# Altium PCB NaiS6202HD_0.7 - Copy.PcbDoc (part 2 of 2)
Units mm, origin at the board's own origin, x right, y up, seen from the top; angles counter-clockwise.
Board outline 60 x 38 mm, 4 copper layers (Top, INT1, GND, Bottom), stack 0.965 mm thick; 148 components, 224 nets, 688 pads, 377 vias.
Unrouted connection lines stored in the file: 231.
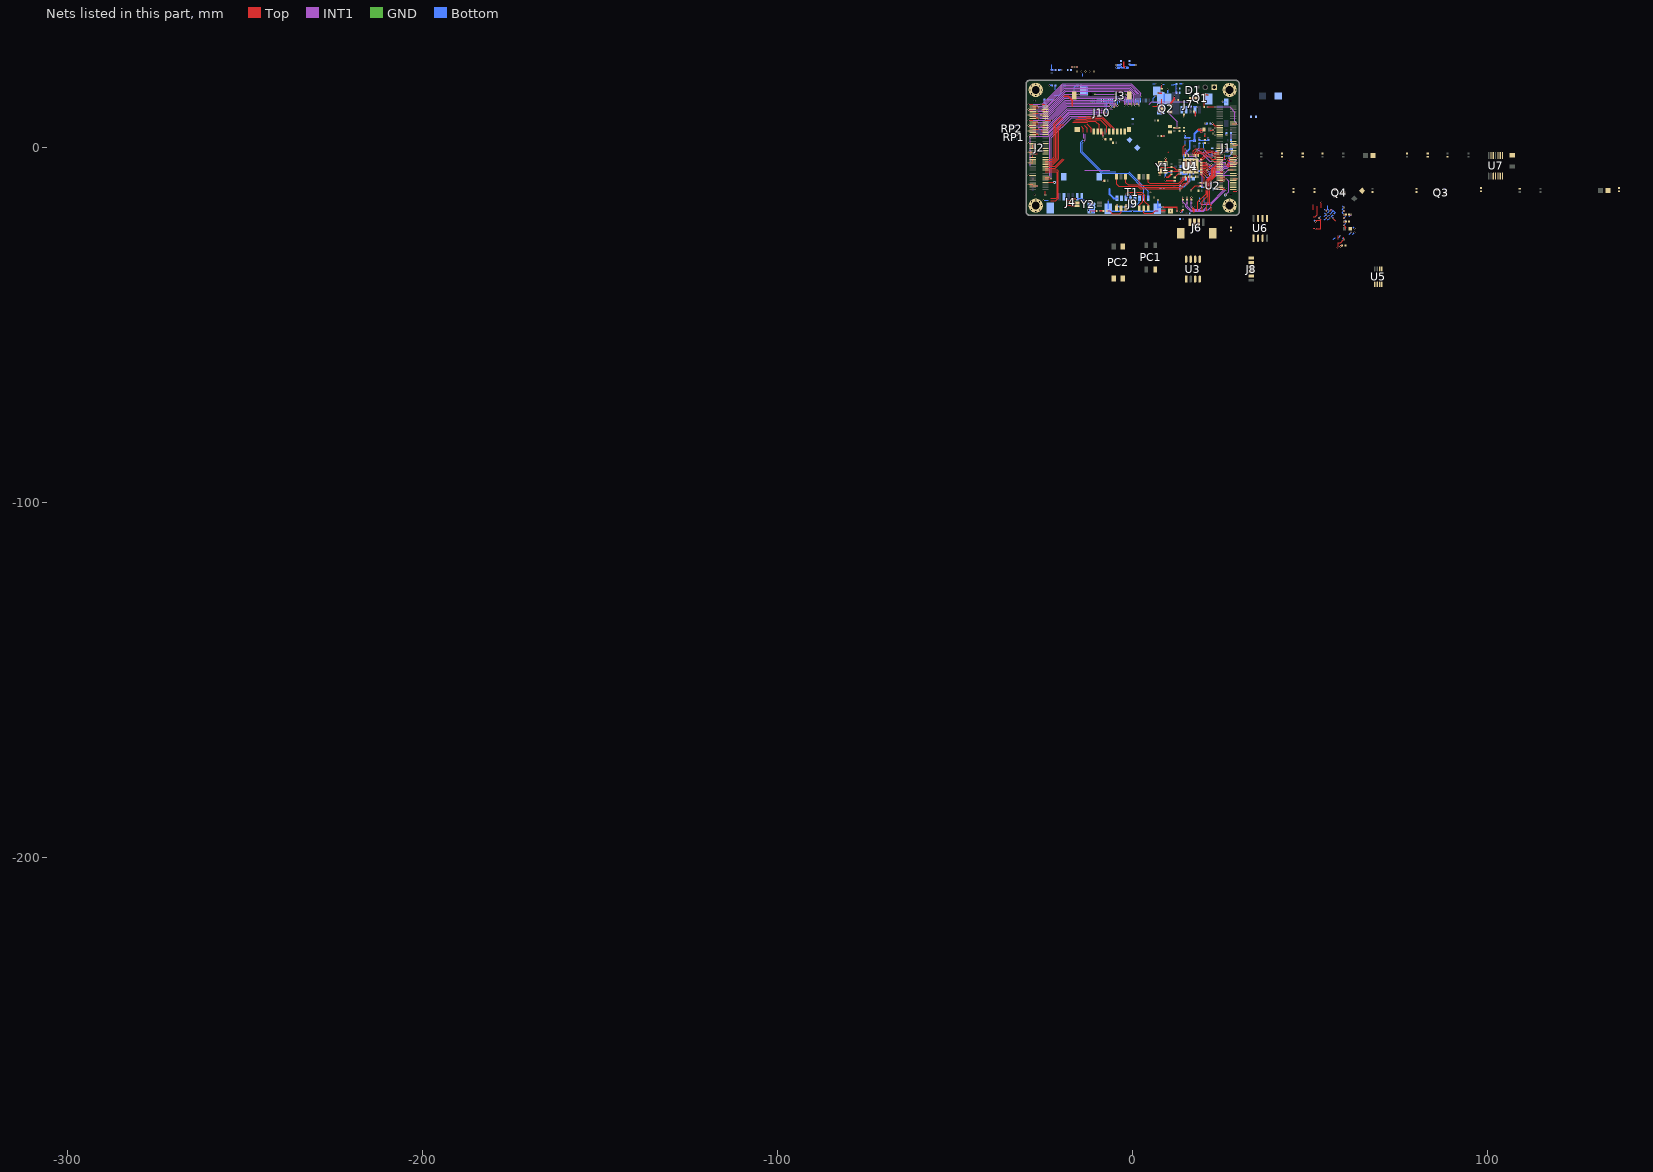
[diagram p4: the nets of this part, all layers, seen from the top]

## Via types
v1: diameter 0.5, hole 0.25, Top to Bottom, tented both sides, 331 vias
v2: diameter 0.5, hole 0.25, Top to Bottom, 46 vias

## Nets (pads, with @x,y where several pads share a name; then routed paths per layer and width w, separated by ;. In a path a pad name is that pad's centre, name@x,y a point inside that pad or via, vN(x,y) a via of type N, cw(c..) or ccw(c..) an arc to the next point about the centre after c; other vN are vias at no path point) (continued)
GND: BAT1.2 BC1.2 BC2.2 BC3.2 BC4.2 BC5.2 BC6.2 BC7.2 BC8.2 BC9.2 BC10.2 BC11.2 BC12.2 BC13.2 BC14.2 BC15.2 BC16.1 BC17.1 BC18.1 BC19.1 BC20.1 BC21.1 C1.1 C2.2 C3.1 C4.1 C5.2 C6.2 C7.2 C8.2 C9.2 C10.2 C11.2 C12.2 C14.2 C15.2 C16.2 C17.2 C18.2 C21.2 C22.2 C23.2 C24.1 C25.1 C26.1 D1.1 J1.2 J1.13 J1.16 J1.17 J1.23 J1.33 J1.42 J1.47 J1.49 J1.51 J1.53 J1.63 J1.65 J1.67 J1.69 J1.71 J1.73 J2.1 J2.8 J2.10 J2.20 J2.34 J2.44 J2.46 J2.56 J2.64 J2.69 J2.70 J2.75 J2.76 J2.81 J2.82 J2.87 J2.88 J2.93 J2.94 J2.99 J2.100 J3.5 J3.8 J3.11 J3.14 J3.17 J3.20 J3.23 J3.26 J3.29 J3.32 J3.M1 J3.M2 J4.2 J4.M1 J4.M2 J5.1 J6.4 J6.5 J6.6 J7.2 J7.M1 J7.M2 J8.2 J9.2 J9.9 J9.10 J10.6 J10.9 J10.10 J10.11 J10.12 MH1.1 MH2.1 MH3.1 MH4.1 PC2.2 PC2.3 Q1.2 Q2.2 Q4.2 R14.1 R16.1 R17.1 R18.1 R19.1 R22.1 R32.1 R33.1 R35.1 R50.1 SW1.2 TVS1.2 TVS2.2 U1.M1 U2.7 U3.4 U4.2 U5.4 U6.5 U7.7 U7.12 U7.13 Y1.2 Y1.4 | length 409.3
  Top w0.2: -12,-17.8 C22.2@-10.15,-17.8 ; v1@7.469,-7.72 v1(7.55,-7.72) ; 8.173,16.923 v1(8.173,17.823) ; 9.9,-1.149 10,-1.249 ; v1(12.475,-17.775) 12.475,-17.694 12.608,-17.561 12.608,-16.65 ; v1(14.4,8.8) BC21.1@14.4,9.35 ; 17.1,-17.875 v1(17.1,-16.6) ; 21.837,5 v1(22.6,5) ; 50.886,-22.65 51.336,-22.65 v1(51.486,-22.8) 52.936,-22.8 52.936,-20.4 ; v1(51.486,-20.8) 51.886,-20.4 52.936,-20.4 ; v1(52.486,-19.8) 52.936,-20.25 52.936,-20.4 ; 53.127,-16.889 v1(53.127,-15.36) ; v1(54.486,-17.8) 54.486,-17.35 ; v1(55.486,-17.8) 55.886,-17.4 55.886,-17.25 ; v1(56.486,-19.8) 56.486,-20.05 57.036,-20.6 ; v1(57.616,-28.163) 57.936,-27.843 57.936,-26.723 58.563,-26.723 v1(59.486,-25.8) 59.486,-25.25 ; 57.936,-25.823 57.936,-24.8 ; v1(58.489,-27.802) 58.791,-27.5 R19.1@59.036,-27.5 ; v1(59.486,-21.8) 60.036,-22.35 60.036,-22.8 ; v1(59.486,-20.8) C25.1@60.036,-20.8 ; v1(59.486,-18.8) C24.1@60.036,-18.8
  Top w0.254: v1(-29.331,-10.25) J2.10@-28.17,-10.25 ; v1(-29.331,-7.75) J2.20@-28.17,-7.75 ; v1(-29.331,-4.25) J2.34@-28.17,-4.25 ; v1(-29.331,-1.25) J2.46@-28.17,-1.25 ; v1(-29.331,1.25) J2.56@-28.17,1.25 ; v1(-29.331,4.75) J2.70@-28.17,4.75 ; v1(-29.331,6.25) J2.76@-28.17,6.25 ; v1(-29.331,7.75) J2.82@-28.17,7.75 ; v1(-29.331,9.25) J2.88@-28.17,9.25 J2.88@-28.095,9.25 ; v1(-29.331,10.75) J2.94@-28.17,10.75 J2.94@-28.095,10.75 ; v1(-29.331,12.25) J2.100@-28.17,12.25 ; J2.8@-28.17,-10.75 v1(-26.95,-10.75) ; J2.44@-28.17,-1.75 -26.95,-1.75 ; -25.8,4.75 J2.69@-24.57,4.75 ; v1(-25.8,6.25) J2.75@-24.57,6.25 ; v1(-25.8,9.25) J2.87@-24.57,9.25 ; -25.8,10.75 J2.93@-24.645,10.75 ; v1(-25.8,12.25) J2.99@-24.57,12.25 ; v1(-24.57,-13.305) J2.1@-24.57,-12.25 ; J2.81@-24.57,7.75 v1(-22.9,7.75) ; v1(23.2,-4.25) J1.33@24.47,-4.25 ; J1.13@24.47,-9.25 v1(25.7,-9.25) ; J1.17@24.47,-8.25 v1(25.7,-8.25) ; J1.2@28.27,-12.25 v1(29.5,-12.25) ; J1.16@28.27,-8.75 v1(29.5,-8.75) ; J1.42@28.27,-2.25 v1(29.5,-2.25)
  Top w0.3: 5.6,11.7 6.8,11.7 v1(7.3,12.2) ; C21.2@10.05,-17.8 v1(10.6,-17.8) ; J1.23@24.645,-6.75 v1(25.7,-6.75)
  Top w0.4: -19.363,14.52 -18.12,14.52 -17,13.4 -17,11.7 ; v1(-8.4,3.164) -8.4,4.538 ; v1(-8.2,2.4) TVS2.2@-7.61,2.4 ; -2.529,24.155 -2.529,22.989 v1(-2.075,22.535) ; v1(7.2,15.4) 8.123,15.4 ; v1(7.55,-7.72) Y1.2@7.55,-6.6 ; BC20.1@8.07,3.28 v1(8.85,3.28) ; v1(8.366,-16.7) 12.558,-16.7 ; v2(9.2,-8.3) 10.05,-8.3 10.9,-7.45 ; v2@9.201,-9.299 R32.1@11.836,-9.299 ; Y1.4@9.25,-4.4 v1(9.25,-3.007) ; Q2.2@10.654,11.949 10.654,12.555 11.7,13.6 v1(11.7,14.4) ; v1(13.5,-18) 13.577,-18 BC1.2@14.127,-17.45 ; 17.125,-18.175 17.125,-17.1 ; v1(17.6,8.85) 17.6,10.2 ; Q1.2@20.203,14.9 v1(21.2,14.9) ; 20.3,3.1 v1(20.3,3.9)
  INT1 w0.254: v1(-29.331,4.75) -24.094,4.75 -18.221,10.623 -7,10.623 ; v1(-29.331,6.25) v1(-25.8,6.25) -24.4,6.25 v1(-22.9,7.75) -18.504,12.146 -5.896,12.146 v2(-5.25,11.5) ; v1(-29.331,7.75) -24.702,7.75 -19.052,13.4 -2.7,13.4 -2.25,12.95 v2(-2.25,11.9) ; v1(-29.331,9.25) v1(-25.8,9.25) -24.975,9.25 -19.125,15.1 -12.947,15.1 ; v1(-29.331,10.75) -25.249,10.75 -19.226,16.773 -0.969,16.773 0.75,15.054 v2(0.75,11.9) ; v1(-29.331,12.25) v1(-25.8,12.25) -25.522,12.25 -19.745,18.027 -0.423,18.027 2.25,15.354 v2(2.25,14.35) ; -28.8,-5 -28.8,2.719 v1(-29.331,3.25) -23.821,3.25 -17.702,9.369 -9.3,9.369 ; -13.477,-6.284 -6.516,-6.284 ; v1(-10.633,15.1) v1(-4.962,15.1) ; v1(-2,15.1) -0.75,13.85 v2(-0.75,12.3)
  Bottom w0.2: -14.094,20.111 -14.094,20.911 ; v2(-2.25,11.9) J3.20@-2.25,13.35 ; v2(-0.75,12.3) J3.23@-0.75,13.35 ; v2(0.75,11.9) J3.26@0.75,13.35 ; v1(8.173,17.823) 8.873,17.823 ; 50.986,-20.3 v1(51.486,-20.8) ; v1(52.486,-19.8) 52.986,-19.3 ; 53.986,-20.3 v1(54.486,-19.8) ; 53.986,-19.3 v1(54.486,-18.8) 53.986,-18.3 ; 53.986,-17.3 v1(54.486,-17.8) 54.986,-17.3 ; 54.986,-20.3 v1(55.486,-19.8) ; 54.986,-19.3 v1(55.486,-18.8) 56.486,-17.8 ; 54.986,-18.3 v1(55.486,-17.8) ; 54.986,-16.3 54.986,-17.3 ; 56.486,-25.8 56.986,-25.3 ; v1(56.486,-19.8) 55.986,-19.3 v1(56.486,-18.8) 56.986,-18.3 56.486,-17.8 ; 57.986,-25.3 v1(58.486,-24.8) ; v1(58.489,-27.802) 58.989,-27.302 ; 58.986,-25.3 v1(59.486,-25.8) ; 58.986,-16.3 v1(59.486,-16.8) 58.986,-17.3 v1(59.486,-17.8) 58.986,-18.3 v1(59.486,-18.8) ; v1(59.486,-21.8) 59.986,-21.3 ; v1(59.486,-20.8) 59.986,-20.3 ; v1(59.486,-19.8) 59.986,-19.3 ; 60.986,-24.3 v1(61.486,-23.8) ; 61.986,-24.3 v1(62.486,-23.8) ; 61.986,-22.3 v1(62.486,-22.8) ; 54.986,-17.3 v1(55.486,-17.8) ; v1(55.486,-17.8) 55.986,-17.3 56.486,-17.8
  Bottom w0.254: v2(-6.75,12.15) J3.11@-6.75,13.35 ; v2(-5.25,11.5) J3.14@-5.25,13.35 ; J3.29@2.25,13.35 v2(2.25,14.35)
  Bottom w0.3: -25.8,10.75 -25.195,10.75 R16.1@-24.645,11.3 ; v1(-25.1,-14.8) -23.843,-14.8 ; 5.643,18 v1(6.5,18) ; v1(6.5,14.6) 5.8,13.9 5.8,12.779 6.721,12.779 v1(7.3,12.2) ; v1(18.8,2.8) 18.8,2.15 BC10.2@21.3,2.15 v1(21.3,2.8) ; v1(25.2,13) 26.221,13 SW1.2@26.378,12.843 ; v1(26.4,3.6) C2.2@26.4,4.15
  Bottom w0.4: v1(-23.5,17.564) C9.2@-22.65,17.564 ; R17.1@-20.744,21.911 v1(-19.994,21.911) ; v1(-12.5,-17.6) J4.M2@-11,-17.6 ; v1(-11.9,-18.1) J4.M2@-11,-18.1 ; J9.10@-6.9,-17.133 v1(-6.9,-14.8) ; J9.10@-6.183,-17.9 v1(-0.1,-17.9) J9.9@6.183,-17.9 ; -3.275,22.895 -3.275,22.535 v1(-2.075,22.535) ; J9.9@7.1,-16.983 v1(7.1,-14.7) ; J9.9@7.1,-16.7 v1(8.366,-16.7) ; v2(9.2,-8.3) 9.2,-7.4 9.851,-6.749 ; 9.873,15.43 v1(9.873,16.423) ; 9.9,-6.7 BC14.2@10.95,-6.7 ; v2(13.3,-12) 13.3,-11.051 14.349,-11.051 16.1,-9.3 16.1,-6.86 ; 13.3,18 v1(14.1,18) ; v1(13.5,-18) 14.158,-18 ; BC9.2@13.9,-7.499 15.068,-7.499 v1(15.068,-6.86) 16.1,-6.86 ; v1(14.8,3.7) 14.8,2.85 BC13.2@16,2.85 ; v1(15.5,-3.583) BC5.2@15.5,-2.999 ; v1(16.663,-3.586) BC4.2@16.663,-3.003 ; 17.068,-7.499 v1(17.068,-6.86) 16.1,-6.86 ; 17.18,11.5 v1(18.2,11.5) ; v1(17.6,-3.549) BC12.2@18.35,-3.549 ; v1(18.05,-6.599) BC8.2@18.818,-6.599 ; v1(20.4,6.8) C1.1@20.95,6.8 ; v1(26.3,0.1) 26.3,0.05 26.7,-0.35 27.9,-0.35
  Bottom w0.6: v1(-4.575,22.535) -3.685,22.535 ; v1(-4.558,23.335) C5.2@-3.498,23.335 ; v1(-2.075,22.535) -1.279,22.535
  other v1: -27.3,-17.9 27.3,-17.9 -26.2,-17.5 28.4,-17.5 -28.5,-17.4 26.1,-17.4 -28.9,-16.3 -25.7,-16.3 25.7,-16.3 28.9,-16.3 -28.5,-15.2 -26.2,-15.2 26.1,-15.2 28.4,-15.2 -27.3,-14.7 27.3,-14.7 6,-14 5,-12.5 25.816,-0.427 25.773,0.584 23.17,3.505 22.643,3.989 23.127,4.516 23.084,5.527 -27.3,14.7 27.3,14.7 -26.2,15.1 -15.3,15.1 28.4,15.1 -28.5,15.2 26.1,15.2 -28.9,16.3 -25.7,16.3 25.7,16.3 28.9,16.3 -28.5,17.4 -26.2,17.4 26.1,17.4 28.4,17.4 -27.3,17.9 27.3,17.9 -15.694,21.511 -14.494,21.511 -13.294,21.511 -12.094,21.511 -10.894,21.511 -17.094,22.711 -16.421,22.711 -15.721,22.711
  other v2: 9.201,-9.3
HDMI_INT: J1.24
HDMI_RSTN: J2.55
HP_INSERT_DET: J1.80
IIC_CLK: J2.25 J7.4 U5.6 | length 13.8
  Top w0.2: J2.25@-24.57,-6.25 -21.25,-6.25 -20.9,-6.6 -20.9,-14.166 -21.634,-14.9 -23.05,-14.9
IIC_SDA: J2.23 J7.5 U5.5 | length 12.2
  Top w0.2: J2.23@-24.57,-6.75 -21.55,-6.75 -21.3,-7 -21.3,-14 -21.55,-14.25 -23.05,-14.25
INT_N: R21.1 U1.34 U2.11 | length 18.2
  Top w0.2: 14.668,-2.149 14.668,-1.2 14.8,-1.068 v2(14.8,-0.357)
  INT1 w0.2: v2(14.8,-0.357) 15.2,-0.757 15.2,-1.573 15.95,-2.323 17.523,-2.323 19.65,-4.45 19.65,-10.65 v2(20.1,-11.1)
  Bottom w0.2: R21.1@19.45,-11.084 20.084,-11.084 20.668,-10.5 U2.11@21.7,-10.5
KEY_1: J1.54 R5.1 R8.1 | length 6
  Top w0.2: J1.54@28.27,0.75 v1(29.5,0.75)
  Bottom w0.2: 27.7,4.15 27.7,1.5 28.45,0.75 v1(29.5,0.75)
KEY_2: J1.56
LCD_EN: J1.46
LCD_RST: J1.44
LED0: J9.7 Q1.3 R1.1 | length 45.1
  Top w0.2: R1.1@16.1,14.05 v1(16.95,14.05) Q1.3@17.861,14.05
  INT1 w0.2: v1(-13.8,2.4) -13.8,3.966 ; 4.6,12.2 5.3,12.9 15.8,12.9 v1(16.95,14.05)
  Bottom w0.2: v1(-13.8,2.4) -14.6,1.6 -14.6,-1.3 -8.7,-7.2 -1.3,-7.2 3.125,-11.625 J9.7@3.125,-14.258
LED1: J9.8 Q2.3 R6.1 | length 32
  Top w0.2: 8.25,13.6 8.25,10.9 8.266,10.9 Q2.3@8.361,10.995 v1(8.361,10.245)
  INT1 w0.2: v1(-13.8,1.7) -13.8,1.764 -13.35,2.214 -13.35,3.85 ; 6.995,10.7 7.45,10.245 v1(8.361,10.245)
  Bottom w0.2: v1(-13.8,1.7) -14.2,1.3 -14.2,-1.134 -8.534,-6.8 -4.8,-6.8 ; -1.134,-6.8 4.375,-12.309 J9.8@4.375,-14.258
LED_AD0: R18.2 U1.35 | length 4.3
  Top w0.2: 14.268,-2.149 14.268,0.268 v2(14.8,0.8)
  Bottom w0.2: v2(14.8,0.8) 14.8,1.95
LED_GN: Q2.1 R4.1 R7.1 | length 7.5
  Top w0.2: v1(9.841,10.041) Q2.1@10.654,10.041 ; 11.7,5.65 12.902,5.65
  INT1 w0.2: v1(9.841,10.041) 12.49,7.392 v1(12.49,5.677)
LED_MLINK: Q1.1 R3.1 | length 1.5
  Top w0.2: 20.154,11.504 Q1.1@20.154,13.041
LX_1V2: BC11.1 BC15.1 FB3.1 FB4.1 L1.1 | length 17.2
  Top w0.6: 18.57,5.08 20.27,5.08 ; v1(19.3,4.5) v1(19.3,5.3)
  Bottom w0.4: FB4.1@13.562,-5.349 14.4,-4.511 14.4,-1.9 16,-0.3 16,1.95 FB3.1@17.388,1.95
  Bottom w0.6: FB3.1@17.4,1.962 17.4,3.9 18.4,4.9 19.3,4.9 ; v1(19.3,4.5) v1(19.3,5.3)
MDI0N: T1.3 U1.3 | length 15.8
  Top w0.2: T1.3@1.898,-8.555 1.898,-9.987 2.4,-10.489 13.062,-10.489 14.668,-8.883 14.668,-8.149
MDI0P: T1.1 U1.2 | length 12.2
  Top w0.2: T1.1@4.436,-8.555 4.436,-9.736 4.734,-10.034 12.95,-10.034 14.268,-8.717 14.268,-8.149
MDI1N: T1.8 U1.6 | length 24.8
  Top w0.2: T1.8@-4.452,-8.555 -4.452,-10.223 -3.863,-10.812 1.412,-10.812 2.1,-11.5 13.615,-11.5 14.666,-10.449 15.164,-10.449 15.868,-9.746 15.868,-8.149
MDI1P: T1.6 U1.5 | length 21.4
  Top w0.2: T1.6@-1.912,-8.355 -1.912,-9.788 -1.288,-10.412 1.578,-10.412 2.266,-11.1 13.449,-11.1 14.5,-10.049 14.999,-10.049 15.468,-9.58 15.468,-8.149
MDI2N: C6.1 U1.8
MDI2P: C5.1 U1.7
MDI3N: C8.1 U1.11
MDI3P: C7.1 U1.10
MIC_DATA_PDM: J1.1
MIC_SCLK_PDM: J1.7
MIPI_CSI_CLK0_DN: J2.74 J3.12 | length 26.1
  Top w0.2: J2.74@-28.17,5.75 v1(-26.95,5.75)
  INT1 w0.2: v1(-26.95,5.75) -24.264,5.75 -18.364,11.65 v2(-6.25,11.65)
  Bottom w0.2: v2(-6.25,11.65) J3.12@-6.25,13.35
MIPI_CSI_CLK0_DP: J2.72 J3.13 | length 27.1
  Top w0.2: J2.72@-28.17,5.25 v1(-26.436,5.25)
  INT1 w0.2: v1(-26.436,5.25) -24.198,5.25 -18.398,11.05 v2(-5.75,11.05)
  Bottom w0.2: v2(-5.75,11.05) J3.13@-5.75,13.35
MIPI_CSI_CLK1_DN: J2.90 J3.24 | length 35.2
  Top w0.2: J2.90@-28.17,9.75 v1(-26.436,9.75)
  INT1 w0.2: v1(-26.436,9.75) -25.079,9.75 -18.883,15.946 -1.503,15.946 -0.25,14.693 v2(-0.25,11.9)
  Bottom w0.2: v2(-0.25,11.9) J3.24@-0.25,13.35
MIPI_CSI_CLK1_DP: J2.92 J3.25 | length 35.2
  Top w0.2: J2.92@-28.17,10.25 v1(-26.95,10.25)
  INT1 w0.2: v1(-26.95,10.25) -25.145,10.25 -19.049,16.346 -1.146,16.346 0.25,14.95 v2(0.25,12.3)
  Bottom w0.2: v2(0.25,12.3) J3.25@0.25,13.35
MIPI_CSI_D0_N: J2.68 J3.9 | length 26.1
  Top w0.2: J2.68@-28.17,4.25 v1(-26.95,4.25)
  INT1 w0.2: v1(-26.95,4.25) -23.99,4.25 -18.044,10.196 -7.896,10.196 v2(-7.8,10.1)
  Bottom w0.2: v2(-7.8,10.1) -7.75,10.15 J3.9@-7.75,13.35
MIPI_CSI_D0_P: J2.66 J3.10 | length 27.6
  Top w0.2: J2.66@-28.17,3.75 v1(-26.436,3.75)
  INT1 w0.2: v1(-26.436,3.75) -23.924,3.75 -17.878,9.796 -8.132,9.796 -7.986,9.65 -7.05,9.65 v2(-7,9.6)
  Bottom w0.2: J3.10@-7.25,13.35 -7.25,9.85 v2(-7,9.6)
MIPI_CSI_D1_N: J2.80 J3.15 | length 27.2
  Top w0.2: J2.80@-28.17,7.25 v1(-26.95,7.25)
  INT1 w0.2: v1(-26.95,7.25) -24.598,7.25 -18.875,12.973 -5.423,12.973 v2(-4.75,12.3)
  Bottom w0.2: v2@-4.75,12.2 v2(-4.75,12.3) J3.15@-4.75,13.35
MIPI_CSI_D1_P: J2.78 J3.16 | length 28.1
  Top w0.2: J2.78@-28.17,6.75 v1(-26.436,6.75)
  INT1 w0.2: v1(-26.436,6.75) -24.532,6.75 -18.709,12.573 -5.673,12.573 -4.95,11.85 -4.3,11.85 v2(-4.25,11.9)
  Bottom w0.2: v2(-4.25,11.9) J3.16@-4.25,13.35
MIPI_CSI_D2_N: J2.84 J3.21 | length 31.1
  Top w0.2: J2.84@-28.17,8.25 v1(-26.436,8.25)
  INT1 w0.2: v1(-26.436,8.25) -24.806,8.25 -19.156,13.9 -2.3,13.9 -1.75,13.35 v2(-1.75,12.3)
  Bottom w0.2: v2(-1.75,12.3) J3.21@-1.75,13.35
MIPI_CSI_D2_P: J2.86 J3.22 | length 32.6
  Top w0.2: J2.86@-28.17,8.75 v1(-26.95,8.75)
  INT1 w0.2: v1(-26.95,8.75) -24.872,8.75 -19.322,14.3 -2.134,14.3 -1.25,13.416 v2(-1.25,11.9)
  Bottom w0.2: v2(-1.25,11.9) J3.22@-1.25,13.35
MIPI_CSI_D3_N: J2.96 J3.27 | length 36.6
  Top w0.2: J2.96@-28.17,11.25 v1(-26.436,11.25)
  INT1 w0.2: v1(-26.436,11.25) -25.353,11.25 -19.403,17.2 -0.792,17.2 1.25,15.158 v2(1.25,12.3)
  Bottom w0.2: v2(1.25,12.3) J3.27@1.25,13.35
MIPI_CSI_D3_P: J2.98 J3.28 | length 38.1
  Top w0.2: J2.98@-28.17,11.75 v1(-26.95,11.75)
  INT1 w0.2: v1(-26.95,11.75) -25.418,11.75 -19.568,17.6 -0.6,17.6 1.75,15.25 v2(1.75,11.9)
  Bottom w0.2: v2(1.75,11.9) J3.28@1.75,13.35
MIPI_CSI_I2C_SCL: J2.17 J3.7 | length 27.2
  Top w0.2: J2.17@-24.57,-8.25 v1(-23.4,-8.25)
  INT1 w0.2: v1(-23.4,-8.25) -23.4,3.067 -17.525,8.942 -11.242,8.942
  GND w0.2: v1@-23.475,-8.25 v1(-23.4,-8.25)
MIPI_CSI_I2C_SDA: J2.15 J3.6 | length 26.5
  Top w0.2: J2.15@-24.57,-8.75 v1(-22.986,-8.75)
  INT1 w0.2: v1(-22.986,-8.75) -22.95,-8.714 -22.95,2.75 -17.2,8.5 -11.9,8.5
MIPI_DSI_CLKN: J2.83
MIPI_DSI_CLKP: J2.85
MIPI_DSI_D0N: J2.71
MIPI_DSI_D0P: J2.73
MIPI_DSI_D1N: J2.77
MIPI_DSI_D1P: J2.79
MIPI_DSI_D2N: J2.89
MIPI_DSI_D2P: J2.91
MIPI_DSI_D3N: J2.95
MIPI_DSI_D3P: J2.97
MIPI_SWITCH_SEL: J1.22
MMC1_CLK: J1.4
MMC1_CMD: J1.6
MMC1_D0: J1.14
MMC1_D1: J1.12
MMC1_D2: J1.10
MMC1_D3: J1.8
N21617464: D2.1 J9.1 | length 4.1
  Bottom w0.6: -6.5,-11.6 -6.5,-13.1 -5.342,-14.258 J9.1@-4.375,-14.258
N21624957: C11.1 R28.1 | length 1.1
  Top w0.4: 8.095,-17.8 9.15,-17.8
N21624998: C12.1 R29.1 | length 1.1
  Top w0.4: -9.25,-17.8 -8.195,-17.8
N21759423: L3.1 U4.3 | length 2.2
  Bottom w0.4: 8.923,12.873 8.923,15.073
N21759480: C20.2 R34.1 R35.2 U4.5 | length 4.5
  Top w0.254: v1(-8.5,-9.3) C20.2@-7.95,-9.3
  Bottom w0.2: 10.823,17.773 11.523,17.773 11.673,17.923 12.323,17.923 12.323,15.523
N21768552: L1.2 U1.32
N21768580: R17.2 U1.48
N21781792: U5.1 Y2.1 | length 3.8
  Top w0.2: -18.75,-16.2 -17.5,-16.2 -17.28,-16.42 Y2.1@-15.05,-16.42
N21781837: U5.2 Y2.4 | length 3.7
  Top w0.2: -18.75,-15.55 Y2.4@-15.02,-15.55
N21781846: BAT1.1 U5.3 | length 5.5
  Top w0.2: -18.75,-14.9 -17.6,-14.9 -17.4,-14.7
  Top w0.4: -17.4,-14.7 -17,-14.3 v1(-15.9,-14.3)
  Bottom w0.4: v1(-15.9,-14.3) -14.3,-14.3 -13.7,-14.9
N21825549: C13.2 L2.1 U3.3 | length 3.9
  Bottom w0.2: -14.635,17.485 -13.385,17.485 -12.783,16.883 -12.783,15.055
N21825600: R30.2 U3.7 | length 4.4
  Bottom w0.2: -22.07,14.846 -20.654,14.846 -20.1,15.4 -20.1,17.564
N21825631: R31.2 R32.2 U3.5 | length 4.2
  Top w0.2: R32.2@11.836,-8.309 12.795,-7.349 13.068,-7.349
  Bottom w0.2: -22.894,21.902 -21.745,21.902 ; -22.794,21.902 -22.794,23.311
N21825652: C18.1 U3.8 | length 1.3
  Bottom w0.2: -21.75,16.274 -21.75,17.564
N21825662: C19.1 U3.6 | length 2.7
  Bottom w0.2: -23.949,13.599 -22.208,13.599 ; -23.024,13.576 -22.07,13.576
N21825703: C19.2 R33.2 | length 4.7
  Top w0.2: v2(16.4,-12) 17.658,-10.742 C19.2@19.143,-10.742
  Bottom w0.2: -24.85,13.6 -24.85,12.85 -24.645,12.645 -24.645,12.2
N21833189: R23.1 U2.8
N21904475: Q3.1 R36.2 R37.2
N21904513: D3.1 Q3.3
N21904537: Q4.3 R38.2
N21904541: PC1.2 R38.1
N21904592: D3.2 R41.2
N21904643: PC2.1 R42.2
N21904713: R44.1 R45.2 U6.1
N21904745: C25.2 R46.1 R49.1 U6.6
N21904768: C24.2 R47.1 R50.2 U6.7 | length 1.3
  Top w0.2: C24.2@60.936,-18.8 v1(61.486,-18.8)
  Bottom w0.2: 60.986,-19.3 v1(61.486,-18.8)
N21911975: U7.3 U7.4 U7.5
N21911995: R52.2 U7.6 U7.9
N21912035: C26.2 R52.1 U7.10
N218255250: C13.1 U3.1 | length 2
  Bottom w0.2: -16.482,16.116 -16.482,17.018 -16.015,17.485 -15.535,17.485
N219045651: Q4.1 R39.2
POE_LINE_1_2+: R28.2 T1.15 | length 5.7
  Top w0.2: T1.15@3.082,-17.045 3.082,-18.282 3.3,-18.5 5.7,-18.5 6.4,-17.8 7.195,-17.8
POE_LINE_3_6-: R29.2 T1.10 | length 5.7
  Top w0.2: -7.305,-17.8 -6.5,-17.8 -5.742,-18.558 -3.6,-18.558 -3.268,-18.226 T1.10@-3.268,-17.045
QSPI_NAND_CLK: J2.41
QSPI_NAND_CS: J2.39
QSPI_NAND_IO0: J2.45
QSPI_NAND_IO1: J2.43
QSPI_NAND_IO2: J2.49
QSPI_NAND_IO3: J2.47
RESET_N: C9.1 R20.2 U1.13 U2.12 | length 6
  Top w0.2: U1.13@19.068,-7.349 19.3,-7.349 19.3,-7.6 20.1,-8.4 v2(20.1,-9.9) 19.201,-9.9 19.143,-9.842
  Bottom w0.2: R20.2@19.496,-9.9 v2(20.1,-9.9) 20.3,-10.1 21.3,-10.1
RGMII_MDC: J1.20 R12.2 U1.14 | length 15.1
  Top w0.2: U1.14@19.068,-6.949 19.5,-6.949 v1(20.6,-8.049) ; v1@20.6,-8.1 v1@20.6,-8.051 ; J1.20@28.095,-7.75 J1.20@28.27,-7.75 v1(29.5,-7.75)
  INT1 w0.2: v1(20.6,-8.049) 21.05,-8.499 22.287,-8.499 23.037,-7.75 v1(29.5,-7.75)
  Bottom w0.2: v1(20.6,-8.049) 20.851,-8.3 21.611,-8.3 22.011,-7.9 22.55,-7.9
RGMII_MDIO: J1.26 R13.2 U1.15 | length 12
  Top w0.2: U1.15@19.068,-6.549 19.864,-6.549 21.114,-7.8 v1(21.4,-7.8) ; v1(27.1,-6.25) J1.26@28.27,-6.25
  INT1 w0.2: v1(21.4,-7.8) 22.421,-7.8 22.871,-7.35 25.75,-7.35 26.85,-6.25 v1(27.1,-6.25)
  Bottom w0.2: v1(21.4,-7.8) 22.5,-6.7 22.55,-6.7
RGMII_RXC: J1.39 R19.2 U1.28 | length 12.7
  Top w0.2: 17.068,-2.149 17.068,-0.907 17.691,-0.284 19.984,-0.284 v2(20,-0.3) ; v1(23.2,-2.75) J1.39@24.47,-2.75 J1.39@24.645,-2.75
  INT1 w0.2: v2(20,-0.3) 20,-0.4 21.6,-2 22.45,-2 v1(23.2,-2.75)
  Bottom w0.2: v2@19.984,-0.284 19.984,0.666 ; v2(20,-0.3) 20,1.25
RGMII_RXCTL: J1.35 R22.2 U1.27 | length 11.9
  Top w0.2: 17.468,-2.149 17.468,-1.366 v2(18.1,-0.734) ; v1(22.449,-3.755) J1.35@24.645,-3.755 ; J1.35@24.47,-3.75 J1.35@24.645,-3.75
  INT1 w0.2: v2(18.1,-0.734) 18.634,-0.734 21.655,-3.755 v1(22.449,-3.755)
  Bottom w0.2: v2(18.1,-0.734) 18.798,-0.036 18.798,1.248
RGMII_RXD0: J1.41 R24.1 U1.26 | length 9.8
  Top w0.2: 17.868,-2.149 17.868,-1.672 18.44,-1.1 v2(19.7,-1.1) ; v2(22.4,-2.6) 22.75,-2.25 J1.41@24.47,-2.25 J1.41@24.645,-2.25
  INT1 w0.2: v2(19.7,-1.1) 21.2,-2.6 v2(22.4,-2.6)
  Bottom w0.2: v2(22.4,-2.6) 22.4,-1.05
RGMII_RXD1: J1.45 R16.2 U1.25 | length 9.5
  Top w0.2: 18.268,-2.149 18.268,-1.882 18.6,-1.549 19.1,-1.549 19.304,-1.754 20.046,-1.754 21,-0.8 22.451,-0.8 22.901,-1.25 J1.45@24.47,-1.25 v1(25.95,-1.25)
  Bottom w0.2: v1(25.95,-1.25) 26.7,-1.25
RGMII_RXD2: J1.43 R15.2 U1.24 | length 7.3
  Top w0.2: U1.24@19.068,-2.949 19.078,-2.939 19.511,-2.939 19.512,-2.939 19.512,-2.934 21.246,-1.2 22.285,-1.2 22.835,-1.75 v1(23.2,-1.75) J1.43@23.6,-1.75 ; J1.43@23.65,-1.75 J1.43@24.47,-1.75 J1.43@24.645,-1.75
  Bottom w0.2: v1(23.2,-1.75) 23.2,-1.45 23.6,-1.05
RGMII_RXD3: J1.37 R14.2 U1.23 | length 9.8
  Top w0.2: U1.23@19.068,-3.349 19.734,-3.349 20.814,-2.269 21.269,-2.269 22.233,-3.233 23.283,-3.233 23.3,-3.25 23.5,-3.25 ; J1.37@24.9,-3.25 25.6,-3.25 25.95,-2.9 v1(25.95,-2.2)
  Bottom w0.2: v1(25.95,-2.2) 27.4,-2.2 27.9,-1.7 27.9,-1.25
RGMII_TXC: J1.30 U1.21 | length 11.1
  Top w0.2: U1.21@19.068,-4.149 20.136,-4.149 20.236,-4.049 v1(20.7,-4.049) ; v1(26.05,-4.55) 26.75,-5.25 J1.30@28.27,-5.25
  INT1 w0.2: v1(20.7,-4.049) 20.7,-4.649 21.801,-5.75 24.253,-5.75 25.453,-4.55 v1(26.05,-4.55)
RGMII_TXCTL: J1.32 U1.20 | length 10.4
  Top w0.2: U1.20@19.068,-4.549 v1(21.3,-4.549) ; v1(26.5,-4.107) 27.143,-4.75 J1.32@28.27,-4.75
  INT1 w0.2: v1(21.3,-4.549) 22.1,-5.349 24.088,-5.349 25.337,-4.1 v1@26.493,-4.1 ; v1(26.5,-4.107) v1@26.493,-4.1 ; v1@26.6,-4.1 v1@26.493,-4.1
RGMII_TXD0: J1.36 U1.19 | length 10.3
  Top w0.2: U1.19@19.068,-4.949 20.9,-4.949 21.1,-5.149 21.8,-5.149 v1(22.2,-4.749) ; v1(26.5,-3.25) 27,-3.75 J1.36@28.27,-3.75
  INT1 w0.2: v1(22.2,-4.749) 24.122,-4.749 25.622,-3.25 v1(26.5,-3.25)
RGMII_TXD1: J1.40 U1.18 | length 12.2
  Top w0.2: U1.18@19.068,-5.349 20.7,-5.349 v1(21.7,-6.349) ; v1(27.1,-2.75) J1.40@28.27,-2.75
  INT1 w0.2: v1(21.7,-6.349) 22.174,-6.349 22.374,-6.15 24.419,-6.15 25.569,-5 26.369,-5 27.4,-3.969 27.4,-3.05 v1(27.1,-2.75)
RGMII_TXD2: J1.38 U1.17 | length 13.6
  Top w0.2: U1.17@19.068,-5.749 20.4,-5.749 v1(20.9,-6.249) ; J1.38@28.27,-3.25 v1(29.5,-3.25)
  INT1 w0.2: v1(20.9,-6.249) 21.45,-6.799 22.29,-6.799 22.539,-6.55 24.584,-6.55 25.734,-5.4 26.534,-5.4 27.684,-4.25 28.5,-4.25 v1(29.5,-3.25)
RGMII_TXD3: J1.34 U1.16 | length 13.3
  Top w0.2: U1.16@19.068,-6.149 20.1,-6.149 v1(21.15,-7.199) ; J1.34@28.27,-4.25 v1(29.5,-4.25)
  INT1 w0.2: v1(21.15,-7.199) 22.456,-7.199 22.705,-6.95 24.75,-6.95 25.9,-5.8 26.7,-5.8 27.7,-4.8 28.95,-4.8 v1(29.5,-4.25)
RTS_485: U6.2 U6.3 U7.8
RXD_DEBUG: J1.5 J6.3 | length 10.3
  Top w0.2: J1.5@24.47,-11.25 v1(25.7,-11.25)
  INT1 w0.2: v1(20.125,-15.458) 22.063,-15.458 25.7,-11.821 v1(25.7,-11.25)
  Bottom w0.2: v1(20.125,-15.458) 20.125,-14.058
SD2_CLK: J2.29 J10.5 RP2.5 | length 15.8
  Top w0.2: J2.29@-24.57,-5.25 -21.85,-5.25 -19.7,-3.1 ; -16.898,7.2 -12.769,7.2 -12.464,7.505 -10.549,7.505 -9.459,6.415 -9.459,4.412
SD2_CMD: J2.27 J10.3 RP2.7 | length 10.9
  Top w0.2: J2.27@-24.57,-5.761 -22.9,-5.761 ; J2.27@-24.57,-5.75 -21.784,-5.75 -19.3,-3.266 ; -12.9,6.8 -11.665,5.565 -11.665,4.412
SD2_DATA0: J2.35 J10.7 RP1.7 | length 27.3
  Top w0.2: J2.35@-24.57,-3.75 -22.634,-3.75 -21.65,-2.766 -21.65,6.55 -19.7,8.5 ; -16.6,7.6 -12.934,7.6 -12.629,7.905 -9.076,7.905 -7.266,6.095 -7.266,4.412
SD2_DATA1: J2.37 J10.8 RP1.5 | length 27.5
  Top w0.2: J2.37@-24.57,-3.25 -22.7,-3.25 -22.05,-2.6 -22.05,6.95 -20.1,8.9 ; -16,8 -13.1,8 -12.795,8.305 -8.671,8.305 -6.161,5.795 ; 50.826,-17.388 50.826,-16.005
SD2_DATA2: J2.31 J10.1 RP2.3 | length 15.8
  Top w0.2: J2.31@-24.57,-4.75 -22.45,-4.75 -20.85,-3.15 -20.85,5.308 -20.058,6.1 ; -14.5,6 -13.866,5.366 -13.866,4.412
SD2_DATA3: J2.33 J10.2 RP2.1 | length 17
  Top w0.2: J2.33@-24.57,-4.25 -22.569,-4.25 -21.25,-2.931 -21.25,5.55 -20.3,6.5 -19.4,6.5 ; -13.7,6.4 -12.761,5.461 -12.761,4.412
SD2_DET: J10.CD RP1.1 TVS2.1 | length 15.5
  Top w0.2: -15.4,8.6 -13.066,8.6 -12.961,8.705 -8.505,8.705 -5.065,5.265 ; 50.796,-19.4 51.386,-19.4 51.921,-18.865 51.921,-17.388 51.921,-16.535
SYS_LED: J1.78 R3.2 | length 13.4
  Top w0.2: 21.05,11.5 v1(23.1,11.5) ; J1.78@28.095,6.75 J1.78@28.27,6.75 v1(29.5,6.75)
  INT1 w0.2: v1(23.1,11.5) 27.3,11.5 28.75,10.05 28.75,7.5 v1(29.5,6.75) v1@29.558,6.75
SYS_RST: C1.2 J1.75 | length 2.9
  Top w0.2: v1(22.5,6.8) 23.05,6.25 J1.75@24.47,6.25 J1.75@24.645,6.25
  Bottom w0.2: C1.2@21.95,6.8 v1(22.5,6.8)
TCK_1V8: J1.27 J8.5 R11.1 | length 23.6
  Top w0.127: 15.327,-14.623 v2(15.327,-13.973) ; 20.875,-17.7 v1(20.875,-16.6) 20.875,-15.825 21.327,-15.373 21.327,-9.411 22.913,-7.824 22.913,-6.224 23.388,-5.75 J1.27@24.47,-5.75
  INT1 w0.127: v2(15.327,-13.973) 15.327,-16.427 16.5,-17.6 19.875,-17.6 v1(20.875,-16.6)
TDI_1V8: J1.25 J8.6 R10.1 | length 25.3
  Top w0.127: 14.127,-14.623 v2(14.127,-13.973) ; 22.125,-17.7 v1(22.125,-16.6) 22.125,-16.4 21.654,-15.929 21.654,-9.546 23.24,-7.96 23.24,-6.359 23.35,-6.25 J1.25@24.47,-6.25
  INT1 w0.127: v2(14.127,-13.973) 14.127,-15.227 15,-16.1 15,-16.562 16.365,-17.927 20.01,-17.927 20.437,-17.5 21.225,-17.5 v1(22.125,-16.6)
TDO_1V8: J1.31 J8.3 | length 16.2
  Top w0.127: 18.375,-17.7 18.375,-15.225 20.673,-12.927 20.673,-9.14 22.259,-7.553 22.259,-5.953 23.463,-4.75 J1.31@24.47,-4.75 J1.31@24.645,-4.75
TMS_1V8: J1.29 J8.4 R9.1 | length 22.2
  Top w0.127: v2@16.427,-13.873 v2(16.527,-13.973) 16.527,-14.623 ; 19.625,-17.7 v1(19.625,-16.6) 19.625,-15 21,-13.625 21,-9.275 22.586,-7.689 22.586,-6.089 23.425,-5.25 J1.29@24.47,-5.25
  INT1 w0.127: v2(16.527,-13.973) 16.527,-16.7 17.1,-17.273 18.952,-17.273 v1(19.625,-16.6)
TOUCH_I2C_SCL: J2.65
TOUCH_I2C_SDA: J2.67
TOUCH_INT: J1.58
TOUCH_RST: J1.48
TPRXN_CON: J9.4 T1.14 | length 9.1
  Top w0.2: v1(-0.625,-13.1) 2.342,-13.1 2.9,-13.658 2.9,-15.2 1.912,-16.188 T1.14@1.912,-17.445
  Bottom w0.2: J9.4@-0.625,-14.258 v1(-0.625,-13.1)
TPRXP_CON: J9.3 T1.16 | length 11.3
  Top w0.2: v1(-1.875,-13.1) -1.375,-12.6 2.6,-12.6 3.4,-13.4 3.4,-15.2 4.452,-16.252 T1.16@4.452,-17.245
  Bottom w0.2: J9.3@-1.875,-14.258 v1(-1.875,-13.1)
TPTXN_CON: J9.6 T1.9 | length 9.2
  Top w0.2: T1.9@-4.438,-17.207 v1(-4.438,-16.1)
  Bottom w0.2: v1(-4.438,-16.1) -3.938,-16.6 0.6,-16.6 1.875,-15.325 J9.6@1.875,-14.258
TPTXP_CON: J9.5 T1.11 | length 5.1
  Top w0.2: v1(-1.9,-16.1) -1.9,-17.243 T1.11@-1.898,-17.245
  Bottom w0.2: v1(-1.9,-16.1) 0,-16.1 0.625,-15.475 J9.5@0.625,-14.258
TRX_N: J4.5 R47.2 R48.2
TRX_P: J4.6 R48.1 R49.2
TXD_DEBUG: J1.3 J6.2 | length 12.6
  Top w0.2: J1.3@24.47,-11.75 v1(26.337,-11.75)
  INT1 w0.2: v1(18.875,-15.4) 19.375,-15.9 19.6,-15.9 19.608,-15.908 22.179,-15.908 v1(26.337,-11.75)
  Bottom w0.2: v1(18.875,-15.4) 18.875,-14.058
USB_OTG_DN: J1.21
USB_OTG_DP: J1.19
USB_OTG_EN: J2.11 TP4.1 | length 2.6
  Top w0.2: J2.11@-24.57,-9.75 v1(-22,-9.75)
USB_OTG_ID: J1.15 TP3.1 | length 6.9
  Top w0.2: J1.15@24.645,-8.75 v1(26.337,-8.75)
  INT1 w0.2: v1(26.1,-13.3) 27,-12.4 27,-9.413 v1(26.337,-8.75)
VADJ_0: J2.36 J2.38 | length 0.5
  Top w0.2: J2.36@-28.17,-3.75 J2.38@-28.17,-3.25
VADJ_1: J2.40 J2.42 | length 0.5
  Top w0.2: J2.40@-28.17,-2.75 J2.42@-28.17,-2.25
VADJ_2: J2.50 J2.52 J2.54 | length 1
  Top w0.2: J2.50@-28.17,-0.25 J2.52@-28.17,0.25 J2.54@-28.17,0.75
WIFI_EN: J1.60
WIFI_WAKE_OUT: J1.52
XTAL_I: C3.2 U1.45 Y1.1 | length 6.4
  Top w0.2: Y1.1@7.75,-4.4 7.75,-5.3 7.95,-5.5 11.05,-5.5 ; 11.2,-5.45 11.543,-5.45 12.243,-6.149 U1.45@13.068,-6.149
XTAL_O: C4.2 U1.46 Y1.3 | length 5.5
  Top w0.2: Y1.3@9.05,-6.6 9.101,-6.549 U1.46@13.068,-6.549
  Bottom w0.6: C4.2@-0.675,23.346 v1@0.825,23.346
  other v1: 0.825,23.335
pads on no net: D1.3 J1.M1 J1.M2 J2.6 J2.12 J2.48 J3.4 J3.33 J3.34 J10.13 J10.14 RP1.3 U1.33 U1.38 U1.39 U1.40 U1.41 U1.42 U1.43 U1.44 U2.5 U2.6 U2.9 U2.10 U5.7 U7.11 Y2.2 Y2.3
copper on no net: | length 180.4
  Top w0.127: 9.008,-15.75 9.008,-15.4 9.498,-14.91 11.218,-14.91 16.268,-9.86 16.268,-8.149 ; 10.208,-15.75 10.208,-15.429 10.4,-15.237 11.354,-15.237 16.654,-9.936 16.654,-8.888 16.654,-8.163 16.668,-8.149 ; 11.408,-15.75 11.953,-15.205 11.953,-15.1 17.481,-9.571 17.481,-8.163 17.468,-8.149 ; 12.608,-15.75 12.608,-14.907 17.868,-9.647 17.868,-8.149
  Top w0.2: -16.9,-9.78 -16.9,-7.65 ; -16.779,-12.642 -16.779,-9.9 ; -14.3,-6.7 -11.75,-6.7 ; v2(-13.7,-10.2) -13.7,-12.647 -13.675,-12.672 -11.172,-12.672 -11.1,-12.6 ; 0.5,16.95 v1(0.5,17.85) ; 5.5,0 7.15,0 ; 7,4.45 8.2,4.45 v1(8.85,4.45) ; 7.1,-2.6 6.5,-2 7.1,-1.4 ; 7.95,1.9 8,1.9 ; 15.468,-2.149 15.468,-0.946 ; 53.536,-14.3 v1(53.536,-13.65) ; 54.436,-14.3 54.436,-12.85 ; v1(54.486,-22.8) 55.136,-22.8 ; v1(54.486,-15.8) 54.586,-15.9 54.586,-16.35 ; 55.224,-21.8 v1(55.843,-21.8) 57.036,-21.8 57.036,-23 56.886,-23.15 ; v1(55.486,-15.8) 55.886,-16.2 55.886,-16.35 ; 56.336,-13.95 56.336,-12.85 56.436,-12.95 ; v1(56.786,-13.923) 56.959,-13.75 57.686,-13.75 ; 56.886,-24.65 57.036,-24.8 ; v1(57.486,-19.8) 57.486,-19.363 ; 57.486,-18.312 v1(57.486,-17.8) 57.486,-17.25 ; 57.486,-16.35 v1(57.486,-15.8) ; 57.936,-20.6 58.286,-20.6 v1(58.486,-20.8) ; v1(59.486,-26.8) 59.936,-27.25 59.936,-27.5 61.136,-27.5 ; 59.486,-24.338 v1(59.486,-23.8) ; 59.786,-13.262 59.786,-14.55 59.836,-14.6 ; 60.636,-14.6 v1(61.286,-14.6) ; 60.936,-22.8 v1(61.486,-22.8) ; 60.936,-20.8 v1(61.486,-20.8) ; v1(61.486,-24.8) 61.986,-24.3 61.986,-22.3 v1(62.486,-21.8) ; v1(61.486,-17.8) 61.886,-18.2 62.036,-18.2 ; 62.074,-19.4 61.886,-19.4 v1(61.486,-19.8) 62.286,-20.6 62.336,-20.6 ; v1(62.486,-15.3) 62.486,-14.147 ; 63.236,-20.6 63.643,-20.6 63.843,-20.8
  Top w0.3: 53.836,-20.4 54.236,-20.8 v1(54.486,-20.8)
  Top w0.4: -23,-18.15 v1(-22.35,-18.15) ; v1(-19.85,-14.25) -18.75,-14.25 ; -14.3,-7.65 -11.15,-7.65 -10.85,-7.35 -10.85,-6.7 ; v1(-14.236,-8.343) -14.236,-7.714 ; v1(-7.8,-14) -7.8,-12.7 ; v1(0.925,24.835) 1.675,24.835 ; 7.966,7.727 8.427,7.727 ; 8.05,-2.6 8.05,0 v2(8.05,0.77) ; 8.05,2.1 v2@8.8,2.1 ; 8.1,7.4 8.427,7.727 ; 13,8.638 11.209,8.638 10.298,7.727 8.427,7.727 ; 15.468,-0.946 15.468,0.168 16.1,0.8 16.1,2.6 ; v1(57.486,-23.8) v1(59.486,-23.8)
  INT1 w0.2: v1(61.486,-20.8) 61.986,-21.3 61.986,-24.3 v1(62.486,-24.8)
  INT1 w0.4: 56.486,-23.8 v1(57.486,-23.8) ; 57.486,-19.288 v1(57.486,-19.8) v1(58.486,-19.8)
  Bottom w0.2: -16.461,-3.3 -16.461,-7.439 v2(-13.7,-10.2) ; v1(0.5,17.85) 1.2,17.85 ; 3.15,15.43 v1(3.15,16.48) ; 3.15,17.8 3.75,17.8 3.988,18.038 4.666,18.038 4.666,15.483 ; v1(22.8,-12.876) 22.8,-11.6 ; 51.486,-16.8 v1(51.486,-15.1) ; 52.986,-17.3 52.986,-18.3 v1(53.486,-18.8) ; 52.986,-16.3 53.986,-16.3 v1(54.486,-15.8) ; 53.986,-23.3 v1(54.486,-22.8) 54.986,-23.3 ; 53.986,-21.3 v1(54.486,-20.8) ; 54.986,-22.3 55.486,-21.8 v1(55.843,-21.8) ; 54.986,-21.3 v1(55.486,-20.8) ; v1(55.486,-15.8) 55.986,-16.3 ; 55.986,-23.3 56.986,-24.3 ; 56.986,-19.3 v1(57.486,-19.8) 57.986,-19.3 ; 56.986,-16.3 56.986,-17.3 v1(57.486,-17.8) ; v1(57.486,-15.8) 57.986,-16.3 ; 57.986,-18.3 v1(58.486,-18.8) ; 57.986,-17.3 v1(58.486,-17.8) ; v1(58.486,-20.8) 58.986,-20.3 ; v1(58.486,-19.8) 58.986,-19.3 ; 58.986,-26.3 v1(59.486,-26.8) ; 58.986,-24.3 v1(59.486,-23.8) 59.986,-24.3 ; 59.986,-25.3 v1(60.486,-24.8) ; 59.986,-18.3 v1(60.486,-17.8) ; 59.986,-17.3 v1(60.486,-16.8) ; 59.986,-16.3 v1(60.486,-15.8) ; v1(60.486,-26.8) 60.986,-27.3 ; v1(60.486,-25.8) 60.986,-25.3 ; 60.986,-23.3 v1(61.486,-22.8) ; 60.986,-22.3 v1(61.486,-21.8) 61.986,-21.3 61.986,-20.3 v1(61.486,-19.8) ; 60.986,-21.3 v1(61.486,-20.8) ; 60.986,-18.3 v1(61.486,-17.8) ; 60.986,-17.3 v1(61.486,-17.8) ; 60.986,-16.3 v1(61.486,-15.8) ; v1(61.486,-24.8) 61.986,-25.3 ; v1(61.486,-19.8) 61.986,-19.3 ; 61.986,-18.3 v1(61.486,-17.8) ; v1(62.486,-24.8) 62.986,-25.3 ; v1(62.486,-21.8) 62.986,-22.3 ; 62.486,-16.8 v1(62.486,-15.3) ; 62.986,-24.3 v1(63.486,-23.8) ; 62.986,-21.3 63.486,-20.8 63.843,-20.8
  Bottom w0.4: 2.2,15.43 v1(2.2,16.423) ; v1(17,18) 17.913,18 ; 21.6,-14.1 v1(22.3,-14.1) ; 24,-17.158 v1(24,-15) ; 24.642,-18.3 v1(25.8,-18.3) ; v1(62.171,-28.33) 62.171,-27.115
  other v1: 58.986,-15 56.01,-14.729 56.816,-14.705 58.986,-14.2 55.985,-13.923 6.857,1 7.6,5.927 8.4,5.927 7.6,6.727 8.4,6.727
  other v2: 8.85,2.1

## Polygon pours and split planes (outlines as drawn)
GND on Top "TOP_GND" (solid, remove dead copper, pour order 17): -6.35,-9.245 -6.35,-16.355 6.35,-16.355 6.35,-9.245
+5.0V on INT1 "INT1-5V" (solid, remove dead copper, pour order 19): -6,20.6 -7.3,19.3 -7.3,18.6 -7.3,16 -7.3,15.859 -5.641,14.2 -5.441,14 -2.5,14 16.1,14 19.5,10.6 20.9,9.2 20.9,6.3 20.9,1.6 21.3,1.2 21.5,1 22.4,1 23.452,1 23.652,1.2 23.8,1.348 23.8,1.8 23.8,6.3 23.8,11.527 21.819,13.508 15.827,19.5 13.3,19.5 -7.1,19.5
no net on INT1 "INT_1V8" (solid, remove dead copper, pour order 14): 59.586,-13.7 58.886,-13.7 58.586,-14 58.613,-14.027 58.613,-18.584 58.613,-19.127 58.786,-19.3 58.986,-19.5 58.986,-19.936 58.95,-19.936 58.286,-20.6 58.086,-20.8 55.843,-20.8 55.786,-20.8 55.286,-20.3 55.186,-20.2 54.286,-20.2 54.036,-20.2 53.836,-20.4 53.836,-21.6 53.836,-22.15 53.986,-22.3 54.186,-22.5 55.186,-22.5 56.986,-22.5 57.359,-22.873 57.886,-23.4 57.886,-23.8 57.886,-27.705 58.236,-28.055 58.314,-28.132 58.625,-28.132 58.981,-28.132 59.105,-28.008 59.234,-27.879 59.234,-26.548 59.234,-22.252 59.586,-21.9 60.27,-21.216 60.27,-16.673 60.27,-14.384 59.586,-13.7
GND on GND "GND" (solid, remove dead copper, pour order 20): -46.704,21.696 -46.704,-22.972 40.681,-22.972 40.681,22.775

## Keep-outs
Top:
  lines w0.2: -29,-19 28.994,-19
Bottom:
  lines w0.2: 29.994,-18 cw(c28.994,-18) 28.994,-19 -29,-19 cw(c-29,-18) -30,-18 -30,18 cw(c-29,18) -29,19 28.994,19 cw(c28.994,18) 29.994,18 ; 30,-18 30,18
Keep-Out Layer:
  lines w0.2: 29.994,-18 cw(c28.994,-18) 28.994,-19 -29,-19 cw(c-29,-18) -30,-18 -30,18 cw(c-29,18) -29,19 28.994,19 cw(c28.994,18) 29.994,18 ; 30,-18 30,18
Assembly Drawing Top:
  lines w0.2: 29.994,-18 cw(c28.994,-18) 28.994,-19 -29,-19 cw(c-29,-18) -30,-18 -30,18 cw(c-29,18) -29,19 28.994,19 cw(c28.994,18) 29.994,18 ; 30,-18 30,18

## Other copper
Top:
  region net GND: 23.95,0.85 23.85,0.75 23.85,-0.65 24,-0.8 26.35,-0.8 26.67,-0.48 26.67,0.58 26.4,0.85
  region net GND: 24.725,5.375 24.272,5.828 22.928,5.828 22.272,5.172 22.272,3.828 22.922,3.178 24.375,3.178 24.725,3.528
  region: 30.085,4.35
  region net +5.0V: 25.102,2.75 22.15,2.75 22.066,2.666 22.066,1.334 22.2,1.2 25.103,1.2 25.153,1.25 25.153,2.7
  region net +3.3V: 13.27,10.87 12.83,10.87 12.1,11.6 12.1,12.2 12.4,12.5 13.532,12.5 13.916,12.116 13.916,11.516
  region: 59.71,-12.877 58.586,-14 58.586,-15.1 58.886,-15.4 59.132,-15.4 59.836,-14.696 59.836,-12.86
  region: 56.121,-13.3 55.586,-13.835 55.586,-14.8 55.886,-15.1 56.886,-15.1 57.178,-14.808 57.178,-13.792 56.686,-13.3
  region: 7.3,7.187 7.3,6.512 7.233,6.444 7.233,5.3 8.388,5.3 8.7,5.612 8.7,7.2 8.488,7.412 8.2,7.412
INT1:
  region net +3.3V: 12.134,12.1 12.134,11.5 12.734,10.9 13.3,10.9 13.95,11.55 13.95,12.016 13.566,12.4 12.434,12.4
  pour cut-out: 23.256,5.9 22.6,5.244 22.6,4 23.373,3.227 24.127,3.227 24.3,3.4 24.3,5.528 23.928,5.9
GND:
  pour cut-out: 0.181,23 -0.1,22.719 -0.1,21.4 0.3,21 3.9,21 4.3,21.4 4.3,22.6 3.9,23
  pour cut-out: 22.15,2.75 22.066,2.666 22.066,1.334 22.2,1.2 23.5,1.2 23.6,1.3 23.6,2.6 23.45,2.75
Bottom:
  region net GND: -18.825,25 -19.152,24.673 -19.152,23.189 -19.139,23.189 -18.15,22.2 -10.45,22.2 -9.85,22.8 -9.85,23.5 -10.05,23.7 -16.35,23.7 -17.65,25
  region net +3.3V: -5,-11.7 -5,-12.7 -4.857,-12.843 -3.957,-12.843 -3.525,-13.275 -3.525,-14.385 -2.725,-14.385 -2.725,-13.125 -2.3,-12.7 -2.3,-11.7 -2.5,-11.5 -4.8,-11.5
  region net +5.0V: -1.6,27.4 -1.6,25.9 -2.1,25.4 -9,25.4 -9,27.5 -8.7,27.8 -2,27.8
  pour cut-out: -0.996,18.4 -1.002,16.124 -4.5,16.1 -7.1,13.4 -7.1,11.7 -14.3,11.705 -14.3,18.138 -14.038,18.4
  region net +3.3V: 10.85,11.5 11.65,12.3 14.55,12.3 14.834,12.016 14.834,11.084 14.55,10.8 11.25,10.8 10.85,11.2
  region: -298.997,-274.998
Multi-Layer:
  lines w0.2: 29.994,-18 cw(c28.994,-18) 28.994,-19 -29,-19 cw(c-29,-18) -30,-18 -30,18 cw(c-29,18) -29,19 28.994,19 cw(c28.994,18) 29.994,18 ; 30,-18 30,18

## Silkscreen, mask and mechanical layers (free items; w line width, h text height)
Silkscreen Top:
  lines w0.2: 29.994,-18 cw(c28.994,-18) 28.994,-19 -29,-19 cw(c-29,-18) -30,-18 -30,18 cw(c-29,18) -29,19 28.994,19 cw(c28.994,18) 29.994,18 ; 30,-18 30,18
  lines w1: -19,20 19,20
Silkscreen Bottom:
  text "NaiS802" at -14.8,6 h1.6
  text "v0.7" at -22.466,4.6 h1
Outline:
  lines w0.2: 29.994,-18 cw(c28.994,-18) 28.994,-19 -29,-19 cw(c-29,-18) -30,-18 -30,18 cw(c-29,18) -29,19 28.994,19 cw(c28.994,18) 29.994,18 ; 30,-18 30,18